# EAGLE board board (EAGLE 8.6.0)
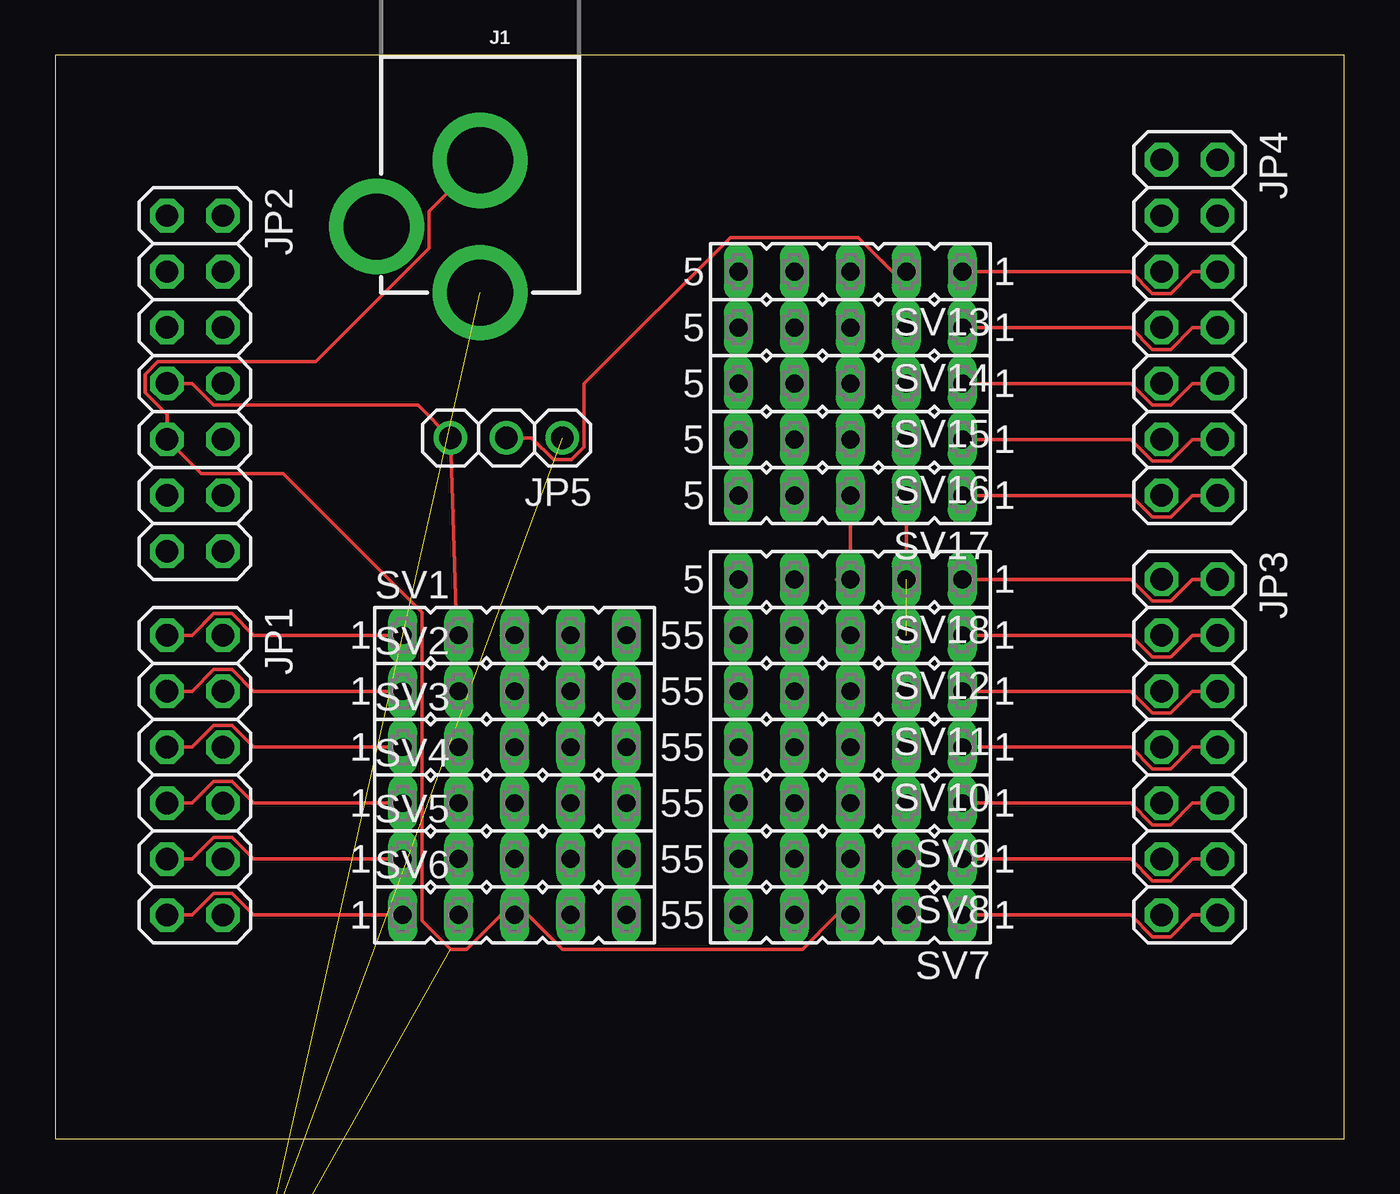
[diagram p0: board, top side]

Size 58.53 x 49.2 mm. Coordinates in mm from the lower left corner, seen from the top.
Outline: 0,0 58.53,0 58.53,49.2 0,49.2 0,0
Copper layers (1*16): Top 0.035mm / dielectric 1.5mm / Bottom 0.035mm
Design rules "default": minimum track width 6mil, minimum drill 0.35mm, track to track 6mil, track to pad 6mil, pad to pad 6mil, via to via 6mil, smd to smd 6mil, copper to edge 40mil, drill to drill 6mil, minimum pad ring 10mil, minimum via ring 8mil, stop-mask expansion 4mil, vias tented up to drill 0mil, thermal gap 10mil

## Footprints (pad centres in the part's own frame; a part is rotated, then mirrored left to right if it is on the bottom)
C025-024X044 = drill 0.813 pad 1.422 octagon: 1 -1.27,0; 2 1.27,0
SOT223 = smd 1.499 x 2.007: 1 -2.261,-3.15; 2 0.025,-3.15; 3 2.311,-3.15 | smd 3.81 x 2.007: 4 0,3.15
POWER_JACK_PTH = drill 2.997 pad 4.318: GND 0,7.7; GNDBREAK 4.7,10.7; PWR 0,13.7
2X06 = drill 1.016 octagon: 1 -6.35,-1.27; 2 -6.35,1.27; 3 -3.81,-1.27; 4 -3.81,1.27; 5 -1.27,-1.27; 6 -1.27,1.27; 7 1.27,-1.27; 8 1.27,1.27; 9 3.81,-1.27; 10 3.81,1.27; 11 6.35,-1.27; 12 6.35,1.27
2X07 = drill 1.016 octagon: 1 -7.62,-1.27; 2 -7.62,1.27; 3 -5.08,-1.27; 4 -5.08,1.27; 5 -2.54,-1.27; 6 -2.54,1.27; 7 0,-1.27; 8 0,1.27; 9 2.54,-1.27; 10 2.54,1.27; 11 5.08,-1.27; 12 5.08,1.27; 13 7.62,-1.27; 14 7.62,1.27
1X03 = drill 1.016: 1 -2.54,0; 2 0,0; 3 2.54,0
FE05-1 = drill 0.813 long: 1 -5.08,0; 2 -2.54,0; 3 0,0; 4 2.54,0; 5 5.08,0

## Placement (x,y rotation side)
C1  [C025-024X044]  3.59,-43.18 0 top  (outside the outline)
C2  [C025-024X044]  3.59,-68.58 0 top  (outside the outline)
IC1  REG1117  [SOT223]  3.59,-17.78 0 top  (outside the outline)
J1  POWER_JACK  [POWER_JACK_PTH]  19.29,52.12 180 top
JP1  [2X06]  6.35,16.51 270 top
JP2  [2X07]  6.35,34.29 270 top
JP3  [2X07]  51.5,17.78 270 top
JP4  [2X07]  51.5,36.83 270 top
JP5  [1X03]  20.49,31.82 180 top
SV1  [FE05-1]  20.86,22.86 0 top
SV2  [FE05-1]  20.86,20.32 0 top
SV3  [FE05-1]  20.86,17.78 0 top
SV4  [FE05-1]  20.86,15.24 0 top
SV5  [FE05-1]  20.86,12.7 0 top
SV6  [FE05-1]  20.86,10.16 0 top
SV7  [FE05-1]  36.1,10.16 180 top
SV8  [FE05-1]  36.1,12.7 180 top
SV9  [FE05-1]  36.1,15.24 180 top
SV10  [FE05-1]  36.1,17.78 180 top
SV11  [FE05-1]  36.1,20.32 180 top
SV12  [FE05-1]  36.1,22.86 180 top
SV13  [FE05-1]  36.1,39.37 180 top
SV14  [FE05-1]  36.1,36.83 180 top
SV15  [FE05-1]  36.1,34.29 180 top
SV16  [FE05-1]  36.1,31.75 180 top
SV17  [FE05-1]  36.1,29.21 180 top
SV18  [FE05-1]  36.1,25.4 180 top

## Library data of the parts
C1 C2 JP5 = adafruit
IC1 = burr-brown; MPN: REG1117; OC_FARNELL: 1097566; OC_NEWARK: 14P6981
J1 = SparkFun-Connectors; PROD_ID: CONN-08197
JP1-JP4 = pinhead
SV1-SV18 = con-lsta; OC_FARNELL: unknown; OC_NEWARK: unknown

## Nets
N$1: JP1.1 SV1.1
N$2: JP3.2 SV18.1
N$3: JP1.3 SV2.1
N$4: JP4.14 SV17.1
N$5: JP1.5 SV3.1
N$6: JP1.7 SV4.1
N$7: JP1.9 SV5.1
N$8: JP1.11 SV6.1
N$9: JP3.14 SV7.1
N$10: JP3.12 SV8.1
N$11: JP3.10 SV9.1
N$12: JP3.8 SV10.1
N$13: JP3.6 SV11.1
N$14: JP3.4 SV12.1
N$15: JP4.12 SV16.1
N$16: JP4.10 SV15.1
N$17: C1.2 C2.2 IC1.1 J1.GND JP2.9 SV1.3 SV2.3 SV3.3 SV4.3 SV5.3 SV6.3 SV7.3 SV8.3 SV9.3 SV10.3 SV11.3 SV12.3 SV13.3 SV14.3 SV15.3 SV16.3 SV17.3 SV18.3
N$18: JP5.2 SV7.2 SV8.2 SV9.2 SV10.2 SV11.2 SV12.2 SV13.2 SV14.2 SV15.2 SV16.2 SV17.2 SV18.2
N$19: JP4.8 SV14.1
N$20: JP4.6 SV13.1
N$22: C1.1 IC1.3 J1.PWR
N$24: JP2.7 JP5.3 SV1.2 SV2.2 SV3.2 SV4.2 SV5.2 SV6.2
N$25: C2.1 IC1.2 JP5.1

## Tracks (layer width: path | path; a pad name or v marks a point on that pad's centre or on a via)
N$1
  Top 0.152: JP1.1 6.22,22.86 7.21,23.85 8.03,23.85 9.02,22.86 SV1.1
N$2
  Top 0.152: JP3.2 51.63,25.4 50.64,24.41 49.82,24.41 48.83,25.4 SV18.1
N$3
  Top 0.152: JP1.3 6.22,20.32 7.21,21.31 8.03,21.31 9.02,20.32 SV2.1
N$4
  Top 0.152: JP4.14 51.63,29.21 50.64,28.22 49.82,28.22 48.83,29.21 SV17.1
N$5
  Top 0.152: JP1.5 6.22,17.78 7.21,18.77 8.03,18.77 9.02,17.78 SV3.1
N$6
  Top 0.152: JP1.7 6.22,15.24 7.21,16.23 8.03,16.23 9.02,15.24 SV4.1
N$7
  Top 0.152: JP1.9 6.22,12.7 7.21,13.69 8.03,13.69 9.02,12.7 SV5.1
N$8
  Top 0.152: JP1.11 6.22,10.16 7.21,11.15 8.03,11.15 9.02,10.16 SV6.1
N$9
  Top 0.152: JP3.14 51.63,10.16 50.64,9.17 49.82,9.17 48.83,10.16 SV7.1
N$10
  Top 0.152: JP3.12 51.63,12.7 50.64,11.71 49.82,11.71 48.83,12.7 SV8.1
N$11
  Top 0.152: JP3.10 51.63,15.24 50.64,14.25 49.82,14.25 48.83,15.24 SV9.1
N$12
  Top 0.152: JP3.8 51.63,17.78 50.64,16.79 49.82,16.79 48.83,17.78 SV10.1
N$13
  Top 0.152: JP3.6 51.63,20.32 50.64,19.33 49.82,19.33 48.83,20.32 SV11.1
N$14
  Top 0.152: JP3.4 51.63,22.86 50.64,21.87 49.82,21.87 48.83,22.86 SV12.1
N$15
  Top 0.152: JP4.12 51.63,31.75 50.64,30.76 49.82,30.76 48.83,31.75 SV16.1
N$16
  Top 0.152: JP4.10 51.63,34.29 50.64,33.3 49.82,33.3 48.83,34.29 SV15.1
N$17  (3 unrouted)
  Top 0.152: 20.24,22.86 SV1.3 SV2.3 SV3.3 SV4.3 SV5.3 SV6.3 | SV13.3 SV14.3 SV15.3 SV16.3 SV17.3 SV18.3 | SV18.3 SV12.3 SV11.3 SV10.3 SV9.3 SV8.3 SV7.3 35.48,10.16 33.93,8.61 23.03,8.61 21.48,10.16 SV6.3 | SV18.3 35.48,25.4 | SV6.3 20.24,10.16 18.69,8.61 17.95,8.61 16.67,9.89 16.67,23.89 10.36,30.2 6.63,30.2 JP2.9 5.08,32.89 4.09,33.88 4.09,34.7 4.67,35.28 11.83,35.28 16.98,40.43 16.98,42.11 J1.GND
N$18  (1 unrouted)
  Top 0.152: SV18.2 SV17.2 SV16.2 SV15.2 SV14.2 SV13.2 38.02,39.37 36.47,40.92 30.65,40.92 24.02,34.29 24.02,31.41 23.44,30.83 22.62,30.83 21.63,31.82 JP5.2 | SV7.2 SV8.2 SV9.2 SV10.2 SV11.2 SV12.2
N$19
  Top 0.152: JP4.8 51.63,36.83 50.64,35.84 49.82,35.84 48.83,36.83 SV14.1
N$20
  Top 0.152: JP4.6 51.63,39.37 50.64,38.38 49.82,38.38 48.83,39.37 SV13.1
N$22  (2 unrouted)
N$24
  Top 0.152: SV2.2 SV3.2 SV4.2 SV5.2 SV6.2 | SV2.2 SV1.2 | JP2.7 6.22,34.29 7.21,33.3 16.47,33.3 JP5.3 SV2.2
N$25  (2 unrouted)